# EAGLE board LED wall Ed 1 ver x.2 (EAGLE 6.4)
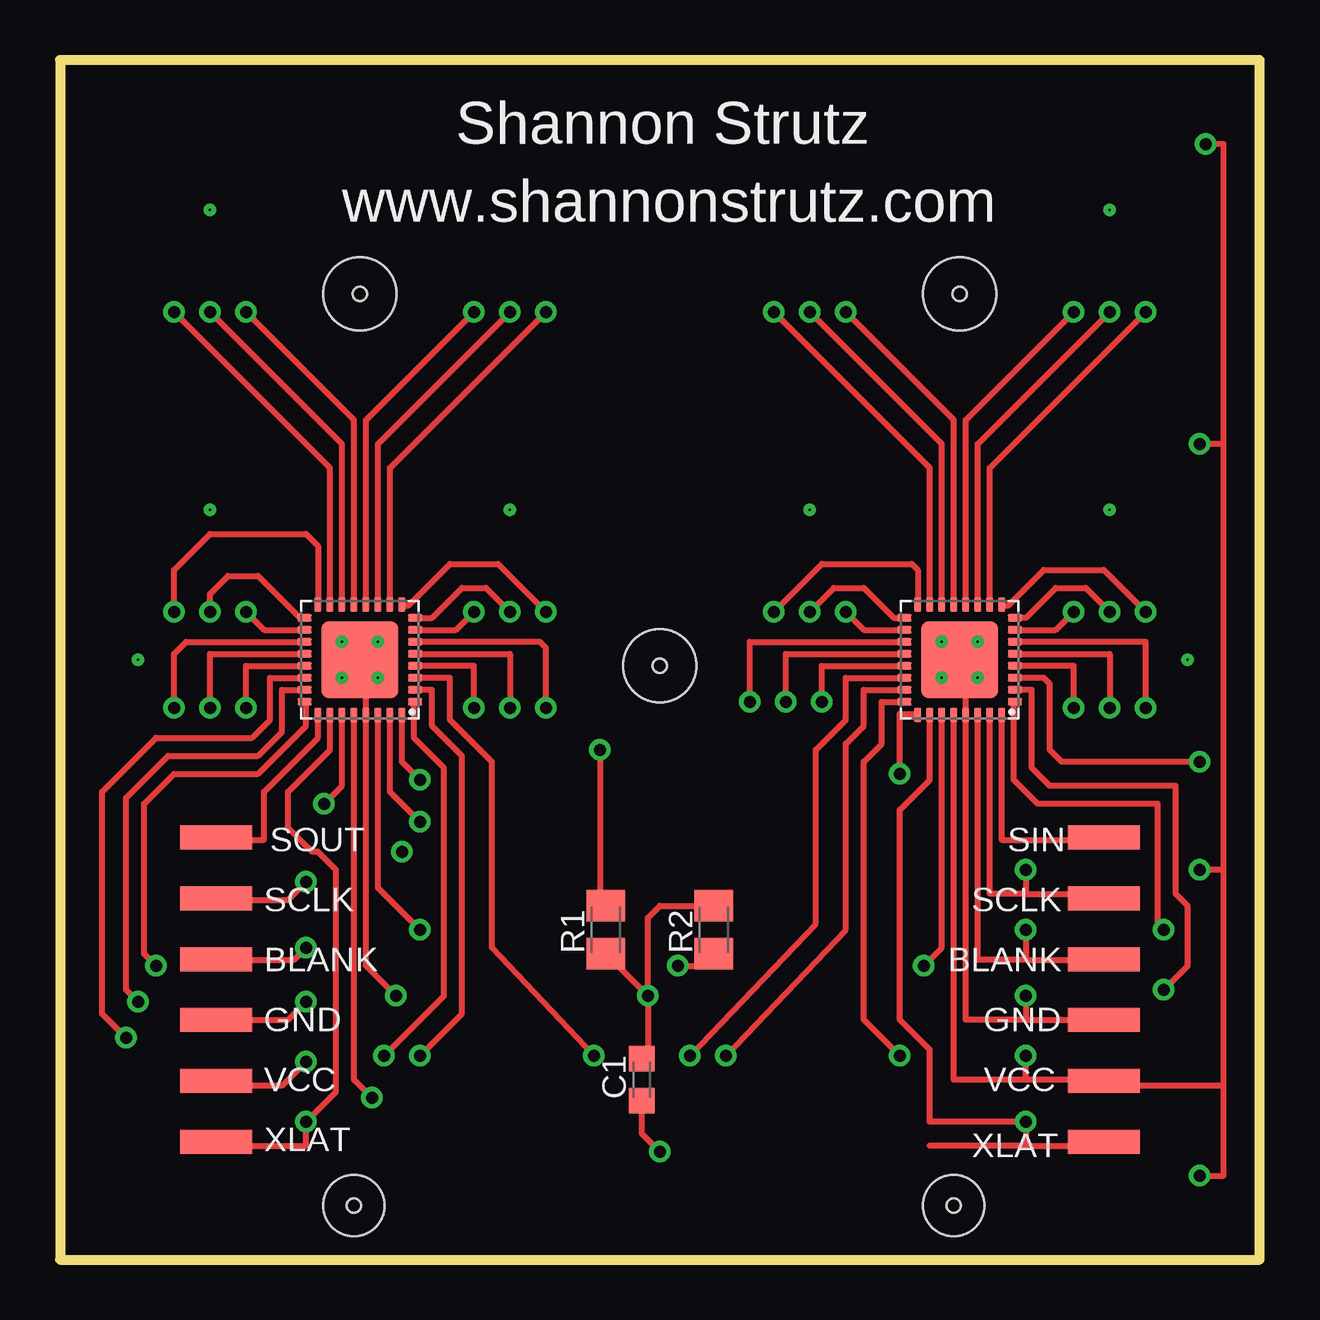
[diagram p0: board, top side]
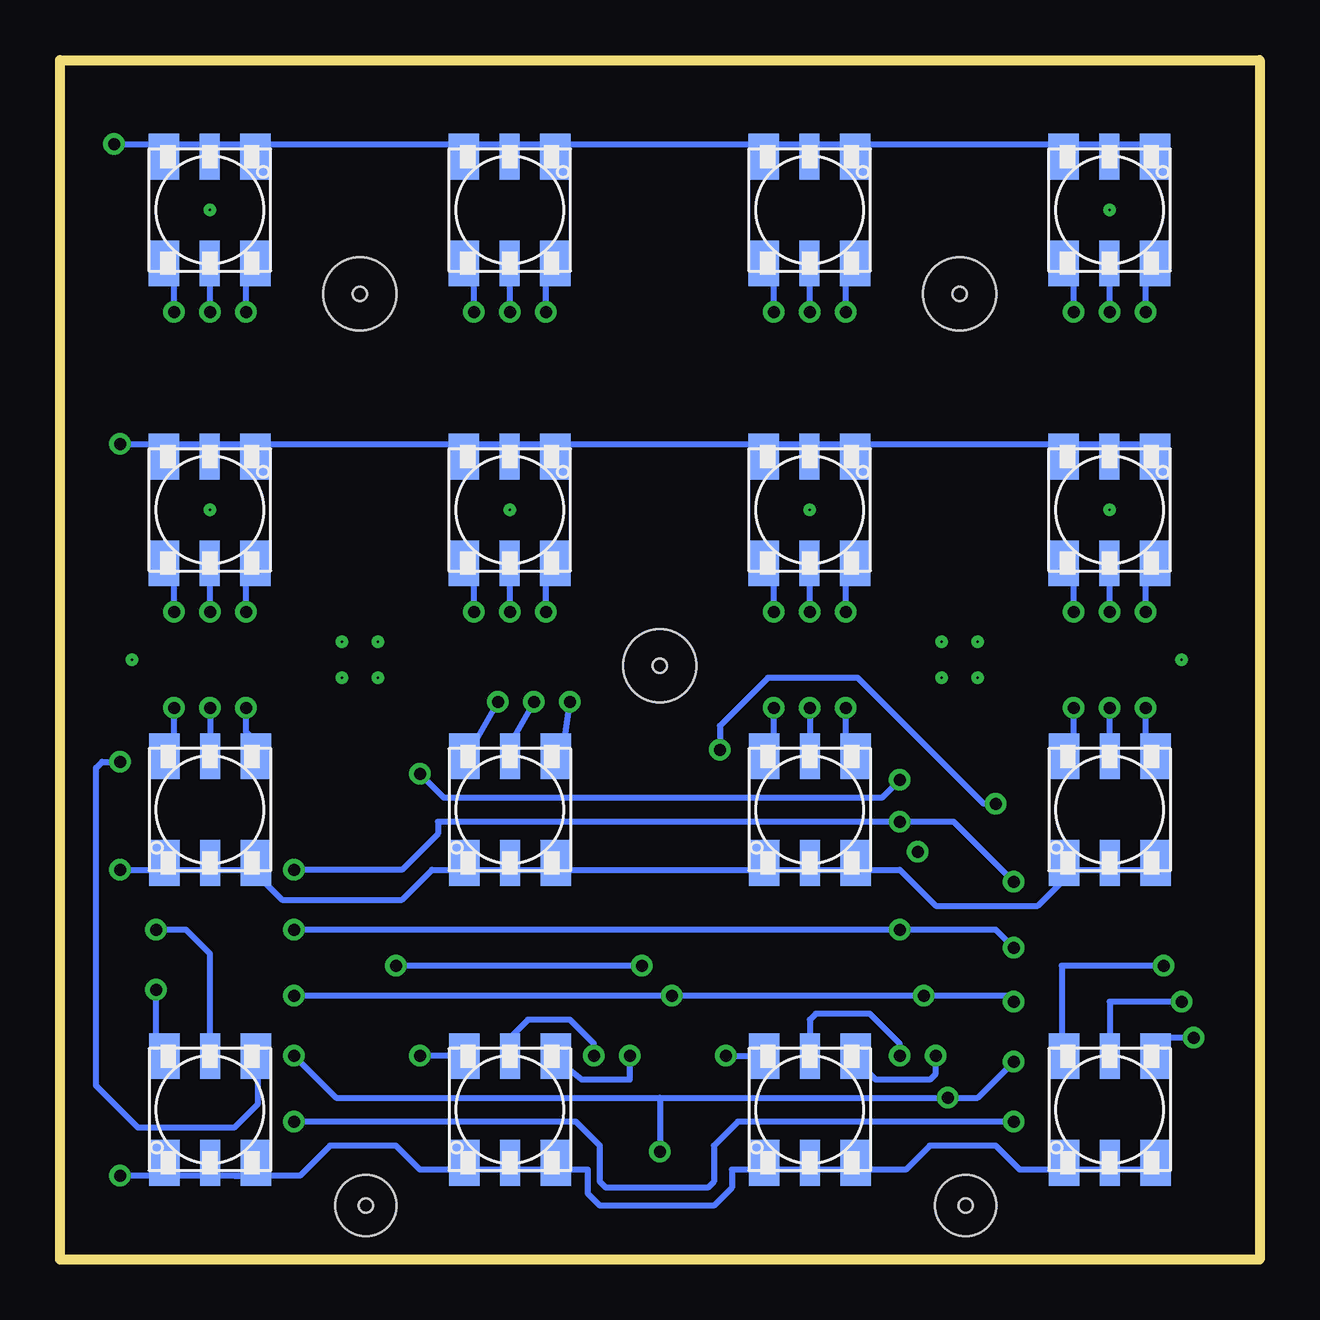
[diagram p1: board, bottom side, seen from below]

Size 50 x 50 mm. Coordinates in mm from the lower left corner, seen from the top.
Outline: 50,0 50,50 0,50 0,0 50,0
Copper layers (1*16): Top 0.035mm / dielectric 1.5mm / Bottom 0.035mm
Design rules "default": minimum track width 10mil, minimum drill 24mil, track to track 8mil, track to pad 8mil, pad to pad 8mil, via to via 8mil, smd to smd 8mil, copper to edge 40mil, drill to drill 8mil, minimum pad ring 10mil, minimum via ring 8mil, stop-mask expansion 4mil, vias tented up to drill 0mil, thermal gap 10mil
Holes 0.6 mm at 12.25,2.25 37.25,2.25 12.5,40.25 25,24.75 37.5,40.25

## Footprints (pad centres in the part's own frame; a part is rotated, then mirrored left to right if it is on the bottom)
C0603K = smd 1.05 x 1.08: 1 -0.875,0; 2 0.875,0
5050-TRI = smd 1.27 x 1.905: P$1 -1.902,-2.219; P$3 1.908,-2.219; P$4 -1.902,2.226; P$6 1.908,2.226 | smd 0.838 x 1.905: P$2 0.003,-2.219; P$5 0.003,2.226
QFN32 = smd 0.6 x 0.3: 1 -2.3,1.75; 2 -2.3,1.25; 3 -2.3,0.75; 4 -2.3,0.25; 5 -2.3,-0.25; 6 -2.3,-0.75; 7 -2.3,-1.25; 8 -2.3,-1.75; 17 2.3,-1.75; 18 2.3,-1.25; 19 2.3,-0.75; 20 2.3,-0.25; 21 2.3,0.25; 22 2.3,0.75; 23 2.3,1.25; 24 2.3,1.75 | smd 0.3 x 0.6: 9 -1.75,-2.3; 10 -1.25,-2.3; 11 -0.75,-2.3; 12 -0.25,-2.3; 13 0.25,-2.3; 14 0.75,-2.3; 15 1.25,-2.3; 16 1.75,-2.3; 25 1.75,2.3; 26 1.25,2.3; 27 0.75,2.3; 28 0.25,2.3; 29 -0.25,2.3; 30 -0.75,2.3; 31 -1.25,2.3; 32 -1.75,2.3 | smd 3.2 x 3.2: EXP 0,0
1X06-SMD = smd 1 x 3: 1 -6.35,5; 2 -3.81,5; 3 -1.27,5; 4 1.27,5; 5 3.81,5; 6 6.35,5
STAND-OFF-TIGHT = hole 3.048: 0,0
DRILL_0.1000 = hole 2.54: 0,0
C0805K = smd 1.3 x 1.6: 1 -1,0; 2 1,0

## Placement (x,y rotation side)
C1  [C0603K]  24.25,7.5 90 top
E$1  [5050-TRI]  6.25,43.75 180 bottom
E$2  [5050-TRI]  31.25,43.75 180 bottom
E$3  [5050-TRI]  43.75,43.75 180 bottom
E$4  [5050-TRI]  18.75,43.75 180 bottom
E$5  [5050-TRI]  6.25,31.25 180 bottom
E$6  [5050-TRI]  18.75,31.25 180 bottom
E$7  [5050-TRI]  31.25,31.25 180 bottom
E$8  [5050-TRI]  43.75,31.25 180 bottom
E$9  [5050-TRI]  6.25,6.25 0 bottom
E$10  [5050-TRI]  18.75,6.25 0 bottom
E$11  [5050-TRI]  31.25,6.25 0 bottom
E$12  [5050-TRI]  43.75,6.25 0 bottom
E$13  [5050-TRI]  6.25,18.75 0 bottom
E$14  [5050-TRI]  18.75,18.75 0 bottom
E$15  [5050-TRI]  31.25,18.75 0 bottom
E$16  [5050-TRI]  43.75,18.75 0 bottom
E$17  [QFN32]  12.5,25 180 top
E$18  [QFN32]  37.5,25 180 top
E$19  [1X06-SMD]  48.5,11.25 90 top
E$20  [1X06-SMD]  1.5,11.25 270 top
E$21  [STAND-OFF-TIGHT]  25,24.75 0 bottom
E$22  [STAND-OFF-TIGHT]  12.5,40.25 0 bottom
E$23  [STAND-OFF-TIGHT]  37.5,40.25 0 bottom
E$24  [DRILL_0.1000]  12.25,2.25 0 top
E$25  [DRILL_0.1000]  37.25,2.25 0 top
R1  [C0805K]  22.75,13.75 90 top
R2  [C0805K]  27.25,13.75 90 top

## Library data of the parts
C1 = rcl
E$1-E$16 = 5050
E$17 E$18 = ftdichip
E$19-E$23 = SparkFun
E$24 E$25 = special-drill
R1 R2 = ref-packages

## Nets
S$42: E$18.EXP R2.2

## Tracks (layer width: path | path; a pad name or v marks a point on that pad's centre or on a via)
BLANK  (via drill 0.5 pad 0.25)
  Top 0.254: 40.25,12.5 43.25,12.5 | 40.25,12.5 38.25,12.5 38.25,22.75 | v40.25,13.75 40.25,12.5 | v15,13.75 13.25,15.5 13.25,22.75 | v10.25,13 9.75,12.5 6.25,12.5
  Bottom 0.254: v40.25,13.75 v15,13.75 11,13.75 v10.25,13
IREF1  (via drill 0.5 pad 0.25)
  Top 0.254: v25.75,12.25 27,12.25 27.25,12.5 | 36.75,22.75 36.75,13 v36,12.25
  Bottom 0.254: v25.75,12.25 v36,12.25
S$1  (via drill 0.5 pad 0.25)
  Top 0.254: 35.75,22.75 35,22.75 v35,20.25
S$2
  Top 0.254: 10.75,22.75 10.75,21.75 8.5,19.5 8.5,17.5 5.5,17.5
S$3  (via drill 0.5 pad 0.25)
  Top 0.254: 39.75,23.75 40.5,23.75 40.5,20.5 41.25,19.75 46.5,19.75 46.5,15.25 47,14.75 47,12.25 v46,11.25
  Bottom 0.254: v46,11.25 46,9 45.5,8.5
S$4  (via drill 0.5 pad 0.25)
  Top 0.254: 40,24.25 41,24.25 41.25,24 41.25,21.25 41.75,20.75 v47.5,20.75
  Bottom 0.254: v47.5,20.75 48.25,20.75 48.5,20.5 48.5,7.25 46.75,5.5 42.75,5.5 41.75,6.5 41.75,8.25 42,8.5
S$5  (via drill 0.5 pad 0.25)
  Top 0.254: 39.75,24.75 42.25,24.75 v42.25,23
  Bottom 0.254: v42.25,23 42.25,22 41.75,21.5
S$6  (via drill 0.5 pad 0.25)
  Top 0.254: 10.25,25.75 5.25,25.75 4.75,25.25 v4.75,23
  Bottom 0.254: v4.75,23 4.75,21.5 4.5,21.25
S$7  (via drill 0.5 pad 0.25)
  Top 0.254: 39.75,25.25 43.75,25.25 v43.75,23
  Bottom 0.254: v43.75,23 43.75,21.5 43.5,21.25
S$8  (via drill 0.5 pad 0.25)
  Top 0.254: 11.75,22.75 11.75,19.75 v11,19 | v22.5,21.25 22.5,14.75
  Bottom 0.254: v11,19 11.5,19 16.75,24.25 20.5,24.25 22.5,22.25 v22.5,21.25
S$9  (via drill 0.5 pad 0.25)
  Top 0.254: 10.25,25.25 6.25,25.25 v6.25,23
  Bottom 0.254: 6.25,21 v6.25,23
S$10  (via drill 0.5 pad 0.25)
  Top 0.254: 10.25,24.75 7.75,24.75 v7.75,23
  Bottom 0.254: v7.75,23 7.75,21.75 8.25,21.25
S$11  (via drill 0.5 pad 0.25)
  Top 0.254: 10.25,24.25 8.75,24.25 8.75,22.5 8,21.75 4,21.75 1.75,19.5 1.75,10.25 v2.75,9.25
  Bottom 0.254: v2.75,9.25 4.5,9.25 4.5,8.75
S$12  (via drill 0.5 pad 0.25)
  Top 0.254: 10.25,23.75 9.25,23.75 9.25,22 8.25,21 4.5,21 2.75,19.25 2.75,11.25 v3.25,10.75
  Bottom 0.254: v3.25,10.75 6.25,10.75 6.25,8.75
S$13  (via drill 0.5 pad 0.25)
  Top 0.254: 14.75,26.25 16.5,26.25 v17.25,27
  Bottom 0.254: v17.25,27 17.25,28.75 17,29
S$14  (via drill 0.5 pad 0.25)
  Top 0.254: 14.75,23.25 14.75,21.75 16,20.5 16,11 v13.5,8.5
  Bottom 0.254: v13.5,8.5 13.5,7.75 13.75,7.5 16,7.5 17,8.5
S$15  (via drill 0.5 pad 0.25)
  Top 0.254: 14.75,23.75 15.5,23.75 15.5,22.25 16.75,21 16.75,10.25 v15,8.5
  Bottom 0.254: v15,8.5 15,9 16.25,10.25 18.5,10.25 18.75,10 18.75,9 19,8.75 18.75,8.75
S$16  (via drill 0.5 pad 0.25)
  Top 0.254: 35.25,26.25 33.5,26.25 v32.75,27
  Bottom 0.254: v32.75,27 32.75,29.25 33,29.5
S$17  (via drill 0.5 pad 0.25)
  Top 0.254: 15,24.25 16.25,24.25 16.25,22.5 18,20.75 18,13 v22.25,8.5
  Bottom 0.254: v22.25,8.5 20.5,8.5
S$18  (via drill 0.5 pad 0.25)
  Top 0.254: 14.75,24.75 17.25,24.75 v17.25,23
  Bottom 0.254: v17.25,23 17.25,21.5 17,21.25
S$19  (via drill 0.5 pad 0.25)
  Top 0.254: 14.75,25.25 18.75,25.25 v18.75,23
  Bottom 0.254: v18.75,23 18.75,21
S$20  (via drill 0.5 pad 0.25)
  Top 0.254: 39.75,23.25 39.75,20 40.75,19 45.75,19 45.75,14 v46,13.75
  Bottom 0.254: v46,13.75 44.75,13.75 43.75,12.75 43.75,8.75
S$21  (via drill 0.5 pad 0.25)
  Top 0.254: v35,8.5 33.5,10 33.5,20.75 34.25,21.5 34.25,23.25 35,23.25
  Bottom 0.254: 33,8.5 v35,8.5
S$22  (via drill 0.5 pad 0.25)
  Top 0.254: 35,23.75 33.5,23.75 33.5,22.25 32.75,21.5 32.75,13.75 v27.75,8.5
  Bottom 0.254: v27.75,8.5 27.75,9 28.75,10 30.5,10 31.5,9
S$23  (via drill 0.5 pad 0.25)
  Top 0.254: 35.25,24.25 32.75,24.25 32.75,22.5 31.5,21.25 31.5,14 v26.25,8.5
  Bottom 0.254: v26.25,8.5 26.25,7.5 28.25,7.5 29.5,8.5
S$24  (via drill 0.5 pad 0.25)
  Top 0.254: 35.25,24.75 31.75,24.75 v31.75,23.25
  Bottom 0.254: v31.75,23.25 32.75,21.5 33,21.25
S$25  (via drill 0.5 pad 0.25)
  Top 0.254: 39.75,26.25 41.5,26.25 v42.25,27
  Bottom 0.254: v42.25,27 42.25,28.75 41.75,29.25
S$26  (via drill 0.5 pad 0.25)
  Top 0.254: 38.25,27.25 38.25,34 v43.75,39.5
  Bottom 0.254: v43.75,39.5 43.75,42
S$27  (via drill 0.5 pad 0.25)
  Top 0.254: 38.75,27.5 38.75,33 v45.25,39.5
  Bottom 0.254: v45.25,39.5 45.25,42
S$28  (via drill 0.5 pad 0.25)
  Top 0.254: 37.75,27.25 37.75,35 v42.25,39.5
  Bottom 0.254: v42.25,39.5 42.25,41
S$29  (via drill 0.5 pad 0.25)
  Top 0.254: 36.75,27.25 36.75,34 v31.25,39.5
  Bottom 0.254: v31.25,39.5 31.25,41.5
S$30  (via drill 0.5 pad 0.25)
  Top 0.254: 37.25,27.25 37.25,35 v32.75,39.5
  Bottom 0.254: v32.75,39.5 32.75,41.25 33.25,41.75
S$31  (via drill 0.5 pad 0.25)
  Top 0.254: 36.25,27.25 36.25,33 v29.75,39.5
  Bottom 0.254: v29.75,39.5 29.75,41 29,41.75
S$32  (via drill 0.5 pad 0.25)
  Top 0.254: 13.25,27.25 13.25,34 v18.75,39.5
  Bottom 0.254: v18.75,39.5 18.75,41.75
S$33  (via drill 0.5 pad 0.25)
  Top 0.254: 13.75,27.25 13.75,33 v20.25,39.5
  Bottom 0.254: v20.25,39.5 20.25,41.25 20.75,41.75
S$34  (via drill 0.5 pad 0.25)
  Top 0.254: 12.75,27.25 12.75,35 v17.25,39.5
  Bottom 0.254: v17.25,39.5 17.25,40.75 16.5,41.5
S$35  (via drill 0.5 pad 0.25)
  Top 0.254: 11.75,27.25 11.75,34 v6.25,39.5
  Bottom 0.254: v6.25,39.5 6.25,41.75
S$36  (via drill 0.5 pad 0.25)
  Top 0.254: 12.25,27.25 12.25,35 v7.75,39.5
  Bottom 0.254: v7.75,39.5 7.75,41.25 8.25,41.75
S$37  (via drill 0.5 pad 0.25)
  Top 0.254: 11.25,27.25 11.25,33 v4.75,39.5
  Bottom 0.254: v4.75,39.5 4.75,41.25 4.25,41.75
S$38  (via drill 0.5 pad 0.25)
  Top 0.254: 10.25,23.25 10.25,22.25 8.25,20.25 4.75,20.25 3.5,19 3.5,12.75 v4,12.25
  Bottom 0.254: v4,12.25 8.25,12.25 8.25,8.5 8,8.5
S$39  (via drill 0.5 pad 0.25)
  Top 0.254: 10.25,26.25 8.5,26.25 v7.75,27
  Bottom 0.254: v7.75,27 7.75,28.75 8.25,29.25
S$40  (via drill 0.5 pad 0.25)
  other vias: 14.25,17
S$41  (via drill 0.1 pad 0.15)
  other vias: 13.25,25.75
S$42  (via drill 0.5 pad 0.25)
  Top 0.254: 36.75,25 E$18.EXP 37.5,25.25 38,24.75 38,23.75 37.75,23.5 37.75,10 40.25,10 | 43.75,9.75 44.25,9.75 44.25,10 41.75,10 | 41.75,10 43.25,10 | 40.25,10 41.75,10 | R2.2 25,14.75 24.5,14.25 v24.5,11 | 24.25,8.5 24.5,8.75 v24.5,11 | 22.75,12.5 23,12.5 v24.5,11 | v40.25,11 40.25,10 | 12,25.25 12.75,24.5 12.75,12.25 v14,11 | v10.25,10.75 9.5,10 6,10
  Bottom 0.254: v40.25,11 v24.5,11 v14,11 10.5,11 v10.25,10.75
S$43  (via drill 0.1 pad 0.15)
  other vias: 11.75,25.75
S$44  (via drill 0.5 pad 0.25)
  Top 0.254: 14.75,25.75 20,25.75 20.25,25.5 v20.25,23
  Bottom 0.254: v20.25,23 20.25,21.5 20.5,21.25
S$45  (via drill 0.1 pad 0.15)
  other vias: 13.25,24.25
S$46  (via drill 0.5 pad 0.25)
  Top 0.254: 14.75,26.75 15.5,26.75 16.75,28 17.75,28 v18.75,27
  Bottom 0.254: v18.75,27 18.75,29 18.5,29.25
S$47  (via drill 0.5 pad 0.25)
  Top 0.254: 14.25,27.25 14.5,27.25 16.25,29 18.25,29 v20.25,27
  Bottom 0.254: v20.25,27 20.25,28.75 20.75,29.25
S$48  (via drill 0.5 pad 0.25)
  Top 0.254: 10.75,27.25 10.75,29.75 10.25,30.25 6.25,30.25 4.75,28.75 v4.75,27
  Bottom 0.254: v4.75,27 4.75,28.5 4.25,29
S$49  (via drill 0.5 pad 0.25)
  Top 0.254: 35.25,25.25 30.25,25.25 v30.25,23.25
  Bottom 0.254: v30.25,23.25 31.25,21.5 31.5,21.25 31.25,21.25
S$50  (via drill 0.1 pad 0.15)
  other vias: 11.75,24.25
S$51  (via drill 0.1 pad 0.15)
  other vias: 36.75,25.75
S$52  (via drill 0.1 pad 0.15)
  other vias: 38.25,25.75
S$53  (via drill 0.5 pad 0.25)
  Top 0.254: 39.75,25.75 45.25,25.75 v45.25,23
  Bottom 0.254: v45.25,23 45.25,21.75 45.75,21.25
S$54  (via drill 0.5 pad 0.25)
  Top 0.254: 39.75,26.75 40.25,26.75 41.5,28 42.75,28 v43.75,27
  Bottom 0.254: v43.75,27 43.75,29.25 44,29.5 44,29.25
S$55  (via drill 0.5 pad 0.25)
  Top 0.254: 39.25,27.25 39.5,27.25 41,28.75 43.5,28.75 v45.25,27
  Bottom 0.254: v45.25,27 45.25,29 45.5,29.25
S$56  (via drill 0.5 pad 0.25)
  Top 0.254: 35.25,25.75 28.75,25.75 v28.75,23.25
  Bottom 0.254: v28.75,23.25 29,21.5 29.25,21.25
S$57  (via drill 0.5 pad 0.25)
  Top 0.254: 35,26.75 34.75,26.75 33.5,28 32.25,28 v31.25,27
  Bottom 0.254: v31.25,27 31.25,29.25
S$58  (via drill 0.5 pad 0.25)
  Top 0.254: 35.75,27.25 35.75,28.75 35.5,29 31.75,29 v29.75,27
  Bottom 0.254: v29.75,27 29.75,28.5 29.25,29
S$59  (via drill 0.5 pad 0.25)
  Top 0.254: 10.25,26.75 10,26.75 8.25,28.5 7,28.5 6.25,27.75 v6.25,27
  Bottom 0.254: v6.25,27 6.25,28.75 6,29
S$60  (via drill 0.1 pad 0.15)
  other vias: 36.75,24.25
S$61  (via drill 0.1 pad 0.15)
  other vias: 38.25,24.25
S$62  (via drill 0.1 pad 0.15)
  other vias: 18.75,31.25
S$63  (via drill 0.1 pad 0.15)
  other vias: 6.25,31.25
S$64  (via drill 0.1 pad 0.15)
  other vias: 31.25,31.25
S$65  (via drill 0.1 pad 0.15)
  other vias: 43.75,31.25
S$66  (via drill 0.1 pad 0.15)
  other vias: 43.75,43.75
S$67  (via drill 0.1 pad 0.15)
  other vias: 6.25,43.75
S$68  (via drill 0.1 pad 0.15)
  other vias: 3.25,25
S$69  (via drill 0.1 pad 0.15)
  other vias: 47,25
SCLK  (via drill 0.5 pad 0.25)
  Top 0.254: 40.25,15.25 43.5,15.25 | 40.25,15.25 38.75,15.25 38.75,22.75 | v40.25,16.25 40.25,15.25 | v10.25,15.75 9.5,15 5.75,15 | v15,18.25 13.75,19.5 13.75,22.75
  Bottom 0.254: v10.25,15.75 12.75,18.25 v15,18.25 34.25,18.25 34.25,17.75 35.75,16.25 v40.25,16.25
SIN
  Top 0.254: 43.75,17.5 39.25,17.5 39.25,22.75
SOUT-SIN  (via drill 0.5 pad 0.25)
  Top 0.254: v15,20 14.25,20.75 14.25,22.75
  Bottom 0.254: v15,20 15.75,19.25 34,19.25 35,20.25
VCC  (via drill 0.5 pad 0.25)
  Top 0.254: 43.25,7.5 43.75,7.5 | 43.25,7.5 40.25,7.5 | 40.25,7.5 37.25,7.5 37.25,22.75 | 40.25,7.5 v40.25,8.5 | 6.25,7.25 9.25,7.25 v10.25,8.25 | v13,6.75 12.25,7.5 12.25,22.75 | v47.75,46.5 48.5,46.5 48.5,34 | 48.5,34 v47.5,34 | 48.5,16.25 48.5,34 | 48.5,16.25 v47.5,16.25 | 48.5,7.25 48.5,3.5 v47.5,3.5 | 48.5,7.25 48.5,16.25 | 43.25,7.5 43.5,7.25 48.5,7.25 | v25,4.5 24.25,5.25 24.25,6.75
  Bottom 0.254: v40.25,8.5 38.5,6.75 25,6.75 | 25,6.75 v13,6.75 11.75,6.75 v10.25,8.25 | 4.25,16.25 7.75,16.25 9.25,14.75 13.5,14.75 15,16.25 34.5,16.25 35.75,15 40.75,15 42,16.25 | v47.75,46.5 4.25,46.5 | 42.25,34 41.75,34 | 42.25,34 4.25,34 | v47.5,34 42.25,34 | 42,16.25 41.75,16.25 | v47.5,16.25 42,16.25 | 42.75,3.5 v47.5,3.5 | 42.75,3.5 41.5,3.5 | 42.75,3.5 40,3.5 38.75,4.75 36,4.75 35,3.75 33,3.75 | 33,3.75 33.25,3.75 | 33,3.75 28,3.75 28,2.75 27.5,2.25 22.75,2.25 22,3 22,3.75 14.75,3.75 13.75,4.75 11,4.75 10,3.75 4,3.75 | 25,6.75 v25,4.5
XLAT  (via drill 0.5 pad 0.25)
  Top 0.254: 40.25,4.75 43.5,4.75 | 40.25,4.75 36.25,4.75 | 40.25,4.75 v40.25,5.75 36.25,5.75 36.25,8.75 35,10 35,18.75 36.25,20 36.25,22.75 | 7,4.75 10.25,4.75 v10.25,5.75 10.75,6.25 | 10.75,6.25 11.25,6.75 | 11.25,22.75 11.25,21.25 9.5,19.5 9.5,18 10.5,17 10.75,17 11.5,16.25 11.5,7 10.75,6.25
  Bottom 0.254: v10.25,5.75 21.75,5.75 22.75,4.75 22.75,3.25 23,3 27.25,3 27.5,3.25 27.5,4.75 28.5,5.75 v40.25,5.75

## Text on the board
_tsilk: Shannon Strutz | www.shannonstrutz.com | SOUT | SIN | SCLK | SCLK | BLANK | BLANK | GND | GND | VCC | VCC | XLAT | XLAT